# EAGLE board boost_converter (EAGLE 9.6.1)
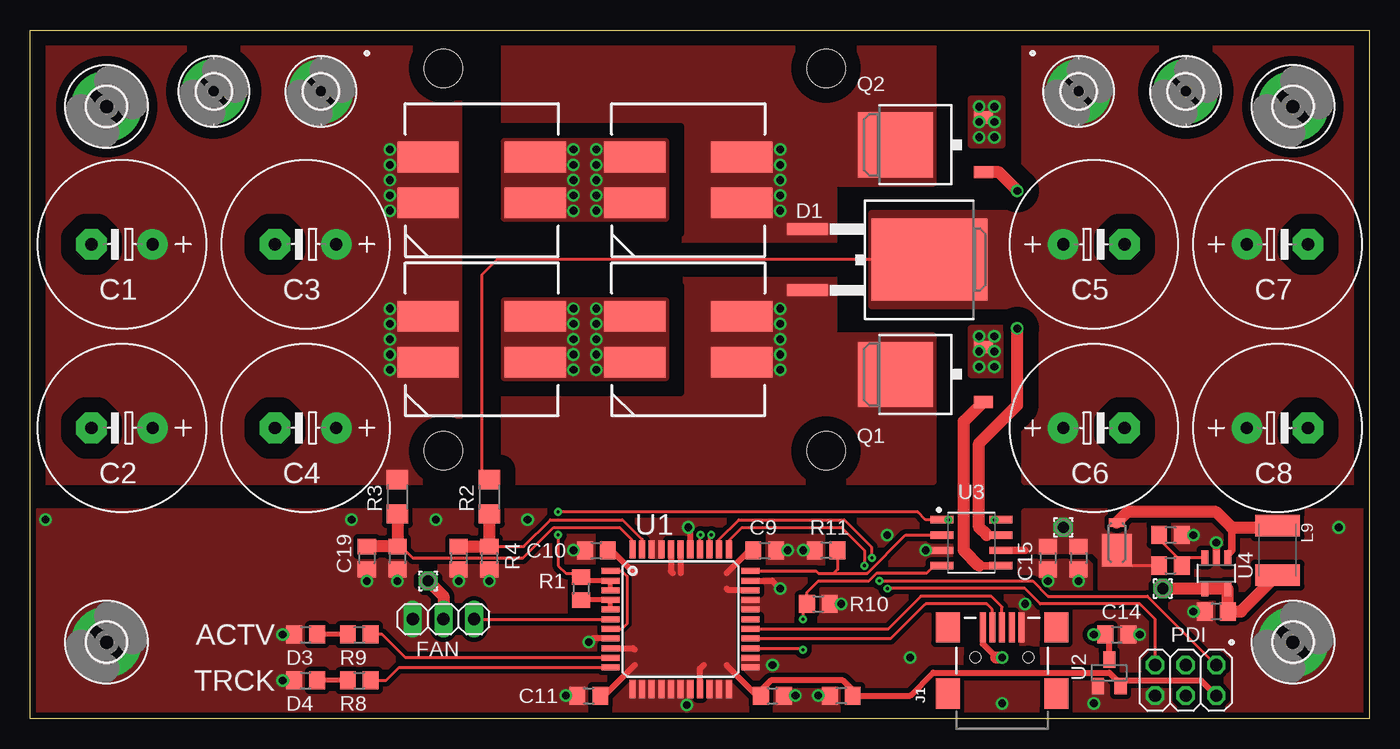
[diagram p0: board, top side]
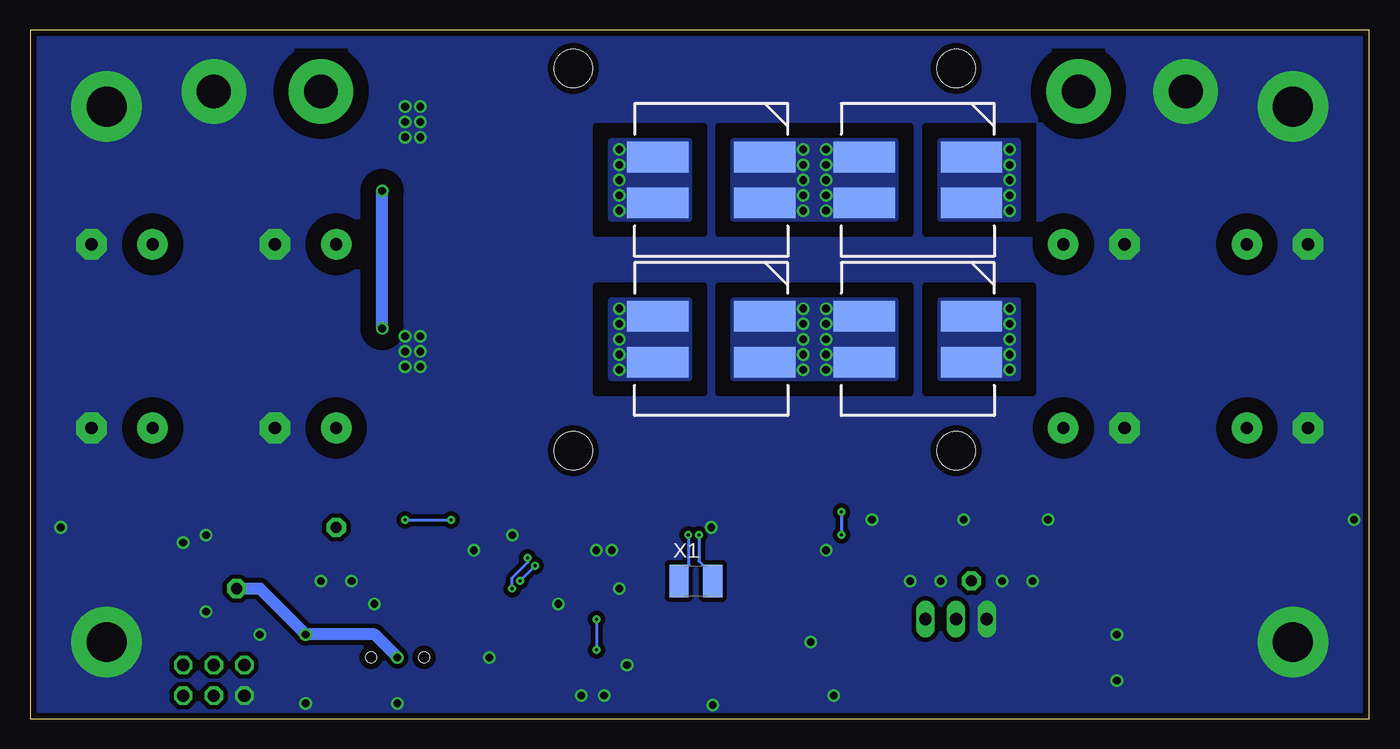
[diagram p1: board, bottom side, seen from below]

Size 111.12 x 57.15 mm. Coordinates in mm from the lower left corner, seen from the top.
Outline: 0,0 0,57.15 111.12,57.15 111.12,0 0,0
Copper layers (1*16): Top 0.035mm / dielectric 0.5mm / Bottom 0.035mm
Design rules "two_layer": minimum track width 5mil, minimum drill 10mil, track to track 5mil, track to pad 5mil, pad to pad 5mil, via to via 5mil, smd to smd 5mil, copper to edge 20mil, drill to drill 8mil, minimum pad ring 10mil, minimum via ring 8mil, stop-mask expansion 4mil, vias tented up to drill 0mil, thermal gap 10mil
Holes 3.17 mm at 34.29,22.23 66.04,22.23 34.29,53.98 66.04,53.98

## Footprints (pad centres in the part's own frame; a part is rotated, then mirrored left to right if it is on the bottom)
E5-13 = drill 1.016 pad 2.54: + -2.54,0 | drill 1.016 pad 2.54 octagon: - 2.54,0
R0805 = smd 1.3 x 1.5: 1 -0.95,0; 2 0.95,0
TO263 = smd 1 x 3.4: 1 -2.54,-6.6; 2 2.54,-6.6 | smd 6.8 x 9.6: 3 0,3.5
POWERMITE = smd 2.7 x 2.5: 1 -0.635,0 | smd 0.7 x 1.3: 2 1.665,0
2,8-PAD = drill 2.8 pad 5.334: B2,8 0,0
3,3-PAD = drill 3.3 pad 5.842: B3,3 0,0
1,6/0,9 = drill 0.914 pad 1.6 octagon: 1 0,0
1X03 = drill 1.016 long: 1 -2.54,0; 2 0,0; 3 2.54,0
USB-MINIB = smd 2.5 x 0.5: D+ 2.5,0; D- 2.5,0.8; GND 2.5,-1.6; ID 2.5,-0.8; VBUS 2.5,1.6 | smd 2.5 x 2: S1 -3,4.5; S2 2.5,4.5; S3 -3,-4.5; S4 2.5,-4.5 | hole 0.9: 0,2.2; 0,-2.2
0.5IN_INDUCTOR = smd 2.54 x 5.08: 1 -1.905,4.445; 2 1.905,4.445; 3 1.905,-4.445; 4 -1.905,-4.445
C1812K = smd 1.8 x 3.7: 1 -2.05,0; 2 2.05,0
2X03 = drill 1.016 octagon: 1 -2.54,-1.27; 2 -2.54,1.27; 3 0,-1.27; 4 0,1.27; 5 2.54,-1.27; 6 2.54,1.27
TO252 = smd 1 x 1.6: 1 -2.28,-4.8; 2 2.28,-4.8 | smd 5.4 x 6.2: 3 0,2.5
R1206 = smd 1.6 x 1.803: 1 -1.422,0; 2 1.422,0
TQFP44 = smd 1.5 x 0.5: 1 -5.8,4; 2 -5.8,3.2; 3 -5.8,2.4; 4 -5.8,1.6; 5 -5.8,0.8; 6 -5.8,0; 7 -5.8,-0.8; 8 -5.8,-1.6; 9 -5.8,-2.4; 10 -5.8,-3.2; 11 -5.8,-4; 23 5.8,-4; 24 5.8,-3.2; 25 5.8,-2.4; 26 5.8,-1.6; 27 5.8,-0.8; 28 5.8,0; 29 5.8,0.8; 30 5.8,1.6; 31 5.8,2.4; 32 5.8,3.2; 33 5.8,4 | smd 0.5 x 1.5: 12 -4,-5.8; 13 -3.2,-5.8; 14 -2.4,-5.8; 15 -1.6,-5.8; 16 -0.8,-5.8; 17 0,-5.8; 18 0.8,-5.8; 19 1.6,-5.8; 20 2.4,-5.8; 21 3.2,-5.8; 22 4,-5.8; 34 4,5.8; 35 3.2,5.8; 36 2.4,5.8; 37 1.6,5.8; 38 0.8,5.8; 39 0,5.8; 40 -0.8,5.8; 41 -1.6,5.8; 42 -2.4,5.8; 43 -3.2,5.8; 44 -4,5.8
SOT23 = smd 1 x 1.4: 1 -0.95,-1.1; 2 0.95,-1.1; 3 0,1.1
SOIC127P600X144-8 = smd 1.901 x 0.599: 1 -2.455,1.905; 2 -2.455,0.635; 3 -2.455,-0.635; 4 -2.455,-1.905; 5 2.455,-1.905; 6 2.455,-0.635; 7 2.455,0.635; 8 2.455,1.905
SOT23-5 = smd 0.6 x 1.2: 1 -0.95,-1.306; 2 0,-1.306; 3 0.95,-1.306; 4 0.95,1.306; 5 -0.95,1.306
C1210 = smd 1.6 x 2.7: 1 -1.4,0; 2 1.4,0

## Placement (x,y rotation side)
C1  [E5-13]  7.62,39.37 180 top
C2  [E5-13]  7.62,24.13 180 top
C3  [E5-13]  22.86,39.37 180 top
C4  [E5-13]  22.86,24.13 180 top
C5  [E5-13]  88.27,39.37 0 top
C6  [E5-13]  88.27,24.13 0 top
C7  [E5-13]  103.5,39.37 0 top
C8  [E5-13]  103.5,24.13 0 top
C9  100n  [R0805]  60.96,13.97 0 top
C10  100n  [R0805]  46.99,13.97 0 top
C11  100n  [R0805]  46.35,1.91 0 top
C12  100n  [R0805]  61.59,1.91 0 top
C13  10u  [R0805]  67.31,1.91 180 top
C14  100n  [R0805]  90.17,6.99 0 top
C15  100n  [R0805]  84.45,13.34 270 top
C16  10u  [R0805]  87,13.34 270 top
C17  10u  [R0805]  98.42,8.89 180 top
C19  1n  [R0805]  27.94,13.34 270 top
C20  1n  [R0805]  35.56,13.34 270 top
D1  [TO263]  71.12,38.1 270 top
D2  MBRM140T3G  [POWERMITE]  90.17,14.61 90 top
D3  [R0805]  22.86,6.99 0 top
D4  [R0805]  22.86,3.17 0 top
E$1  [2,8-PAD]  15.24,52.07 0 top
E$2  [2,8-PAD]  24.13,52.07 0 top
E$3  [2,8-PAD]  87,52.07 0 top
E$4  [2,8-PAD]  95.89,52.07 0 top
E$5  [3,3-PAD]  6.35,50.8 0 top
E$6  [3,3-PAD]  6.35,6.35 0 top
E$7  [3,3-PAD]  104.78,50.8 0 top
E$8  [3,3-PAD]  104.78,6.35 0 top
E$9  [1,6/0,9]  93.98,10.79 0 top
E$10  [1,6/0,9]  85.72,15.88 0 top
E$11  [1,6/0,9]  33.02,11.43 0 top
FAN  [1X03]  34.29,8.26 180 top
J1  [USB-MINIB]  80.64,5.08 90 top
L1  [0.5IN_INDUCTOR]  37.47,44.7 90 top
L2  [0.5IN_INDUCTOR]  37.47,31.5 90 top
L3  [0.5IN_INDUCTOR]  54.61,31.5 90 top
L4  [0.5IN_INDUCTOR]  54.61,44.7 90 top
L5  [0.5IN_INDUCTOR]  37.47,44.7 270 bottom
L6  [0.5IN_INDUCTOR]  37.47,31.5 270 bottom
L7  [0.5IN_INDUCTOR]  54.61,31.5 270 bottom
L8  [0.5IN_INDUCTOR]  54.61,44.7 270 bottom
L9  LQH43CN100K03L  [C1812K]  103.5,13.97 270 top
PDI  [2X03]  95.89,3.17 180 top
Q1  [TO252]  74.3,28.57 90 top
Q2  [TO252]  74.3,47.62 90 top
R1  3.3k  [R0805]  45.72,10.79 270 top
R2  330k  [R1206]  38.1,18.41 90 top
R3  150k  [R1206]  30.48,18.41 90 top
R4  4.7k  [R0805]  38.1,13.34 270 top
R5  4.7k  [R0805]  30.48,13.34 270 top
R6  43.2k  [R0805]  94.61,12.7 0 top
R7  5k  [R0805]  94.61,15.24 180 top
R8  330  [R0805]  27.3,3.17 0 top
R9  330  [R0805]  27.3,6.99 0 top
R10  3.3k  [R0805]  65.41,9.53 0 top
R11  3.3k  [R0805]  66.04,13.97 180 top
U1  [TQFP44]  53.98,8.26 0 top
U2  [SOT23]  89.53,3.81 0 top
U3  IX4340N  [SOIC127P600X144-8]  78.11,14.61 0 top
U4  MIC2288  [SOT23-5]  98.42,12.06 180 top
X1  ABS07W-32.768KHZ-K-2-T  [C1210]  55.88,11.43 0 bottom

## Library data of the parts
C1-C17 C19 C20 D1 D3 D4 L9 Q1 Q2 R1-R11 U2 X1 = ref-packages
D2 = diode
E$1-E$8 = holes
E$9-E$11 = wirepad
FAN PDI = pinhead
J1 = SparkFun-Connectors
L1-L8 = custom
U1 = atmel
U3 = ref-packages-3d
U4 = linear

## Nets
!RESET: PDI.5 U1.35
CTRL: R1.1 U1.2 U1.3 U3.1 U3.8
D+: J1.D+ U1.27
D-: J1.D- U1.26
DAC1: U1.1 U1.7
EN: R1.2 U1.4 U1.5
FAN: FAN.1 U1.6
FB: R6.2 R7.2 U4.3
FB1: C19.1 R3.1 R5.1 U1.44
FB2: C20.1 R2.1 R4.1 U1.43
G1: Q2.1 U3.7
G2: Q1.1 U3.5
GND: C1.- C2.- C3.- C4.- C5.- C6.- C7.- C8.- C9.2 C10.1 C11.1 C12.2 C13.2 C14.2 C15.2 C16.2 C17.2 C19.2 C20.2 D3.1 D4.1 E$1.B2,8 E$4.B2,8 E$5.B3,3 E$6.B3,3 E$7.B3,3 E$8.B3,3 FAN.3 J1.GND PDI.6 Q1.2 Q2.2 R4.2 R5.2 R7.1 R10.2 R11.2 U1.8 U1.12 U1.13 U1.14 U1.15 U1.16 U1.17 U1.18 U1.20 U1.21 U1.22 U1.23 U1.24 U1.29 U1.30 U1.32 U1.38 U1.41 U1.42 U2.1 U3.3 U4.2
LED1: R9.2 U1.10
LED2: R8.2 U1.11
PDI: PDI.1 U1.34
S$2: L1.3 L1.4 L4.1 L4.2 L5.3 L5.4 L8.1 L8.2
S$4: L2.3 L2.4 L3.1 L3.2 L6.3 L6.4 L7.1 L7.2
S$15: D3.2 R9.1
S$16: D4.2 R8.1
SW: D2.2 L9.1 U4.1
SW1: D1.1 L4.3 L4.4 L8.3 L8.4 Q2.3
SW2: D1.2 L3.3 L3.4 L7.3 L7.4 Q1.3
T1: R11.1 U1.33 U3.2
T2: R10.1 U1.25 U3.4
TOSC1: U1.37 X1.2
TOSC2: U1.36 X1.1
V3.3: C9.1 C10.2 C11.2 C12.1 C13.1 PDI.2 U1.9 U1.19 U1.31 U1.39 U1.40 U2.2
V12: C15.1 C16.1 D2.1 E$10.1 R6.1 U3.6
VBUS: C14.1 C17.1 E$9.1 J1.VBUS L9.2 U2.3 U4.4 U4.5
VFAN: E$11.1 FAN.2
VIN: C1.+ C2.+ C3.+ C4.+ E$2.B2,8 L1.1 L1.2 L2.1 L2.2 L5.1 L5.2 L6.1 L6.2 R3.2
VOUT: C5.+ C6.+ C7.+ C8.+ D1.3 E$3.B2,8 R2.2

## Tracks (layer width: path | path; a pad name or v marks a point on that pad's centre or on a via)
!RESET  (via drill 0.25)
  Top 0.254: PDI.5 93.34,8.26 92.08,9.53 83.82,9.53 82.55,10.79 v71.12,10.79 | v69.85,13.34 69.85,14.22 67.56,16.51 58.8,16.51 57.17,14.88 U1.35
  Bottom 0.254: v71.12,10.79 71.12,11.68 69.85,12.95 v69.85,13.34
CTRL  (via drill 0.25)
  Top 0.254: U3.8 v80.01,16.51 | v76.2,16.51 U3.1 74.3,16.51 73.66,17.14 v43.81,17.14 | v43.81,15.24 43.81,12.7 44.45,12.06 45.4,12.06 R1.1
  Top 0.406: U1.3 U1.2 46.01,11.46 R1.1
  Bottom 0.254: v80.01,16.51 v76.2,16.51 | v43.81,17.14 v43.81,15.24
D+
  Top 0.254: U1.27 71.21,7.46 73.91,10.16 79.76,10.16 80.64,9.27 J1.D+
D-
  Top 0.254: U1.26 71.42,6.66 74.3,9.53 79.38,9.53 79.84,9.05 J1.D-
DAC1
  Top 0.254: U1.7 49.11,7.46 49.53,7.87 49.53,11.81 49.09,12.26 U1.1
EN
  Top 0.406: U1.5 U1.4 R1.2
FAN
  Top 0.254: FAN.1 U1.6
FB
  Top 0.254: R7.2 93.67,14.92 95.56,13.02 R6.2 96.2,13.34 97.44,13.34 U4.3
FB1
  Top 0.254: R5.1 30.8,14.29 31.75,13.34 40.89,13.34 43.43,15.88 48.9,15.88 49.98,14.79 U1.44
  Top 1.016: R3.1 R5.1 C19.1
FB2
  Top 0.254: R4.1 40.95,14.29 43.18,16.51 49.15,16.51 50.77,14.88 U1.43
  Top 1.016: R2.1 R4.1 C20.1
G1  (via drill 0.64)
  Top 0.61: U3.7 79.38,15.24
  Top 1.016: 79.38,15.24 78.74,15.88 78.74,22.86 81.92,26.04 v81.92,32.38 | v81.92,43.81 80.39,45.34 Q2.1
  Bottom 1.016: v81.92,32.38 v81.92,43.81
G2
  Top 0.61: U3.5 78.74,12.7
  Top 1.016: 78.74,12.7 77.47,13.97 77.47,24.67 Q1.1
GND  (via drill 0.64)
  Top 0.508: U1.8 46.66,6.66 v46.35,6.35 | U1.32 61.57,11.46 v62.23,10.79 | U1.38 54.77,15.71 v54.61,15.88
  Top 0.61: U4.2 v98.42,14.61
  other vias: 78.74,50.8 80.01,50.8 80.01,49.53 80.01,48.26 78.74,48.26 78.74,49.53 78.74,31.75 80.01,31.75 80.01,30.48 78.74,30.48 78.74,29.21 80.01,29.21 82.55,9.53 45.09,13.97 62.87,13.97 63.5,1.91 44.45,1.91 65.41,1.91 88.27,1.27 92.08,6.99 80.64,1.27 74.3,13.97 84.45,11.43 87,11.43 67.31,9.53 30.48,11.43 38.1,11.43 33.66,16.51 41.27,16.51 71.12,15.24 54.48,1.14 96.52,15.24 96.52,8.89 108.58,15.88 20.95,6.99 20.95,3.17 26.67,16.51 1.27,16.51 61.59,4.45 73.03,5.08 64.14,13.97 27.94,11.43 35.56,11.43
  pour Bottom (isolate 1.27, rank 6, no thermals): 0.64,56.52 110.49,56.52 110.49,0.64 0.64,0.64
  pour Bottom (isolate 0.381, no thermals): 0.64,0.64 0.64,56.52 4.45,56.52 4.45,20.95 27.3,20.95 31.75,25.4 79.38,25.4 83.82,20.95 105.41,20.95 105.41,56.52 110.49,56.52 110.49,0.64
  pour Bottom (isolate 0.381, no thermals): 30.48,56.52 80.64,56.52 110.49,56.52 110.49,55.88 83.82,55.88 80.64,52.7 80.64,46.99 65.41,46.99 65.41,50.8 30.48,50.8 30.48,52.7 27.3,55.88 0.64,55.88 0.64,56.52
  pour Top (isolate 0.635, no thermals): 78.11,51.44 80.64,51.44 80.64,47.62 78.11,47.62
  pour Top (isolate 0.635, no thermals): 78.11,32.38 80.64,32.38 80.64,28.57 78.11,28.57
  pour Top (isolate 0.381, rank 6, no thermals): 0.64,17.14 110.49,17.14 110.49,0.64 0.64,0.64
LED1
  Top 0.254: U1.10 31.14,5.05 29.21,6.99 R9.2
LED2
  Top 0.254: U1.11 30.61,4.25 29.52,3.17 R8.2
PDI  (via drill 0.25)
  Top 0.254: U1.34 57.98,14.79 59.05,15.88 67.31,15.88 69.22,13.97 v69.22,12.7 | v70.48,11.43 83.19,11.43 84.45,10.16 92.71,10.16 PDI.1
  Bottom 0.254: v69.22,12.7 v70.48,11.43
S$2  (via drill 0.64)
  other vias: 45.09,47.24 45.09,45.97 45.09,44.7 45.09,43.43 45.09,42.16 46.99,42.16 46.99,43.43 46.99,44.7 46.99,45.97 46.99,47.24
  pour Top (isolate 1.27, no thermals): 39.37,47.88 39.37,41.53 52.7,41.53 52.7,47.88
  pour Bottom (isolate 1.27, no thermals): 39.37,47.88 39.37,41.53 52.7,41.53 52.7,47.88
S$4  (via drill 0.64)
  other vias: 45.09,34.04 45.09,32.77 45.09,31.5 45.09,30.23 45.09,28.96 46.99,28.96 46.99,30.23 46.99,31.5 46.99,32.77 46.99,34.04
  pour Top (isolate 1.27, no thermals): 39.37,34.67 39.37,28.32 52.7,28.32 52.7,34.67
  pour Bottom (isolate 1.27, no thermals): 39.37,34.67 39.37,28.32 52.7,28.32 52.7,34.67
S$15
  Top 0.406: R9.1 D3.2
S$16
  Top 0.406: R8.1 D4.2
SW
  Top 0.61: U4.1 99.38,13.65 99.69,13.97 99.69,15.88
  Top 1.016: L9.1 103.36,15.88 99.69,15.88 98.42,17.14 91.05,17.14 D2.2
SW1  (via drill 0.64)
  other vias: 62.23,47.24 62.23,45.97 62.23,44.7 62.23,43.43 62.23,42.16
  pour Top (isolate 1.27, rank 2, no thermals): 39.37,56.52 39.37,39.37 66.67,39.37 66.67,44.45 74.93,44.45 74.93,56.52
  pour Bottom (isolate 1.27, no thermals): 56.52,47.88 62.87,47.88 62.87,41.53 56.52,41.53
SW2  (via drill 0.64)
  other vias: 62.23,34.04 62.23,32.77 62.23,31.5 62.23,30.23 62.23,28.96
  pour Top (isolate 1.27, rank 2, no thermals): 39.37,36.83 66.67,36.83 66.67,31.75 74.93,31.75 74.93,19.68 39.37,19.68
  pour Bottom (isolate 1.27, no thermals): 56.52,34.67 62.87,34.67 62.87,28.32 56.52,28.32
T1
  Top 0.254: U1.33 65.22,12.26 65.41,12.06 66.67,12.06 | 66.67,12.06 69.47,12.06 72.64,15.24 U3.2 | R11.1 66.99,12.38 66.67,12.06
T2  (via drill 0.25)
  Top 0.254: U3.4 75.02,12.7 74.38,12.06 70.23,12.06 69.6,11.43 65.41,11.43 64.45,10.48 R10.1 64.45,9.21 64.14,8.89 v64.14,8.26 | U1.25 63.99,5.86 v64.14,5.71
  Bottom 0.254: v64.14,8.26 v64.14,5.71
TOSC1  (via drill 0.25)
  Top 0.254: U1.37 55.58,15.19 v55.63,15.24
  Bottom 0.254: v55.63,15.24 55.63,13.08 54.48,11.94 X1.2
TOSC2  (via drill 0.25)
  Top 0.254: U1.36 56.38,15.1 v56.52,15.24
  Bottom 0.254: v56.52,15.24 56.52,12.7 57.28,11.94 X1.1
V3.3
  Top 0.508: C10.2 48.26,13.97 50.16,12.06 | C9.1 59.69,13.97 57.78,12.06 | C11.2 47.62,1.91 50.16,4.45 | 57.78,4.45 60.33,1.91 C12.1 60.65,2.35 61.47,3.17 67.44,3.17 68.26,2.35 C13.1 73.03,1.91 74.93,3.81 89.53,3.81 90.49,2.86 | PDI.2 97.16,3.17 90.81,3.17 90.49,2.86 | U2.2 90.48,2.85 90.49,2.86 | U1.40 53.17,12.23 53.34,12.06 | U1.39 53.98,12.06 | U1.31 57.92,10.65 57.78,10.79 | U1.19 55.58,4.14 55.88,4.45 | U1.9 50.02,5.86 50.16,5.71
  pour Top (isolate 0.254, no thermals): 49.53,12.7 58.42,12.7 58.42,3.81 49.53,3.81
V12
  Top 0.254: R6.1 91.44,12.7 D2.1
  Top 0.61: U3.6 82.55,13.97
  Top 1.016: 89.86,14.29 D2.1
  pour Top (isolate 0.381, no thermals): 92.71,17.14 82.55,17.14 82.55,13.97 88.27,13.97 88.9,13.34 88.9,10.79 92.71,10.79
VBUS  (via drill 0.64)
  Top 0.508: U2.3 89.53,6.67 C14.1 | J1.VBUS 79.05,6.19 80.16,5.08
  Top 1.016: 80.16,5.08 v80.64,5.08 | v88.27,6.99 C14.1 | E$9.1 94.02,10.76 U4.4 U4.5 C17.1 100.47,8.89 L9.2
  Bottom 1.016: v80.64,5.08 82.55,6.99 v88.27,6.99 92.08,10.79 E$9.1
VFAN
  Top 1.016: E$11.1 34.29,10.16 FAN.2
VIN  (via drill 0.64)
  other vias: 29.84,47.24 29.84,45.97 29.84,44.7 29.84,43.43 29.84,42.16 29.84,34.04 29.84,32.77 29.84,31.5 29.84,30.23 29.84,28.96
  pour Top (isolate 1.27, rank 2, no thermals): 0.64,56.52 35.56,56.52 35.56,19.68 0.64,19.68
  pour Bottom (isolate 1.27, no thermals): 29.21,47.88 35.56,47.88 35.56,41.53 29.21,41.53
  pour Bottom (isolate 1.27, no thermals): 29.21,34.67 35.56,34.67 35.56,28.32 29.21,28.32
VOUT
  Top 0.254: D1.3 38.73,38.1 37.47,36.83 37.47,20.32 37.95,19.84 R2.2
  pour Top (isolate 1.27, rank 2, no thermals): 69.85,41.91 82.55,41.91 82.55,56.52 110.49,56.52 110.49,19.68 82.55,19.68 82.55,34.29 69.85,34.29

## Text on the board
tPlace: ACTV | TRCK